# EAGLE board vcf-lm324-mono (EAGLE 7.6.0)

Size 111.76 x 76.2 mm. Coordinates in mm from the lower left corner, seen from the top.
Outline: 0,0 111.76,0 111.76,76.2 0,76.2 0,0
Copper layers (1*16): Top 0.035mm / dielectric 1.5mm / Bottom 0.035mm
Design rules "default": minimum track width 10mil, minimum drill 24mil, track to track 8mil, track to pad 8mil, pad to pad 8mil, via to via 8mil, smd to smd 8mil, copper to edge 40mil, drill to drill 8mil, minimum pad ring 10mil, minimum via ring 8mil, stop-mask expansion 4mil, vias tented up to drill 0mil, thermal gap 10mil

## Footprints (pad centres in the part's own frame; a part is rotated, then mirrored left to right if it is on the bottom)
0202/7 = drill 0.813 octagon: 1 -3.81,0; 2 3.81,0
SPAD = drill 0.7 pad 1.676 octagon: 1 0,0
C050-024X044 = drill 0.813 octagon: 1 -2.54,0; 2 2.54,0
E2,5-3 = drill 0.813 pad 1.6: + 1.27,0 | drill 0.813 pad 1.6 octagon: - -1.27,0
DO34-7 = drill 0.813 octagon: A 3.81,0; C -3.81,0
DIL14 = drill 0.813 long: 1 -7.62,-3.81; 2 -5.08,-3.81; 3 -2.54,-3.81; 4 0,-3.81; 5 2.54,-3.81; 6 5.08,-3.81; 7 7.62,-3.81; 8 7.62,3.81; 9 5.08,3.81; 10 2.54,3.81; 11 0,3.81; 12 -2.54,3.81; 13 -5.08,3.81; 14 -7.62,3.81
RJ9W = drill 0.813 long: A 2.54,0.635; E -2.54,0.635; S 0,0.635

## Placement (x,y rotation side)
_R5  100k  [0202/7]  58.42,15.24 0 top
AUDIO_IN  AUDIO_IN  [SPAD]  15.24,27.94 0 top
AUDIO_OUT  AUDIO_OUT  [SPAD]  104.14,25.4 0 top
C1  100nF  [C050-024X044]  63.5,53.34 0 top
C2  100nF  [C050-024X044]  71.12,53.34 0 top
C3  1uF  [E2,5-3]  97.79,25.4 0 top
C4  1uF  [E2,5-3]  25.4,27.94 0 top
CV_IN  CV_IN  [SPAD]  15.24,43.18 0 top
D1  1N4148  [DO34-7]  45.72,53.34 0 top
IC1  LM324  [DIL14]  71.12,25.4 0 top
R1  470k  [0202/7]  45.72,27.94 0 top
R2  [0202/7]  78.74,43.18 0 top
R3  10k  [RJ9W]  83.82,53.34 0 top
R4  100k  [0202/7]  45.72,22.86 0 top
R6  1k  [0202/7]  25.4,60.96 0 top
R7  1k  [0202/7]  25.4,43.18 0 top
R8  100k  [RJ9W]  12.7,60.96 0 top

## Library data of the parts
_R5 R1 R2 R4 R6 R7 = r
AUDIO_IN AUDIO_OUT CV_IN = pad
C1-C4 = c
D1 = d
IC1 = ic
R3 R8 = pot

## Nets
GND: _R5.1 D1.C IC1.11 R8.A
N$1: AUDIO_IN.1 C4.+
N$2: C1.1 IC1.2 R1.2 R2.1
N$3: C2.2 R3.E
N$4: C3.+ IC1.1 R2.2 R3.S
N$5: R6.2 R8.S
N$6: AUDIO_OUT.1 C3.-
N$7: _R5.2 IC1.3 R4.2
N$8: CV_IN.1 R7.2
N$9: C1.2 C2.1 D1.A R6.1 R7.1
N$10: C4.- R1.1
VCC: IC1.4 R4.1 R8.E

## Tracks (layer width: path | path; a pad name or v marks a point on that pad's centre or on a via)
GND  (3 unrouted)
N$1  (1 unrouted)
N$2  (3 unrouted)
N$3  (1 unrouted)
N$4  (3 unrouted)
N$5  (1 unrouted)
N$6  (1 unrouted)
N$7  (2 unrouted)
N$8  (1 unrouted)
N$9  (4 unrouted)
N$10  (1 unrouted)
VCC  (2 unrouted)